# Altium PCB ESC.PcbDoc
Units mil, origin at the board's own origin, x right, y up, seen from the top; angles counter-clockwise.
Board outline 7000 x 4500 mil, 2 copper layers (Top Layer, Bottom Layer), stack 33.512 mil thick; 5 components, 103 nets, 48 pads, 0 vias.
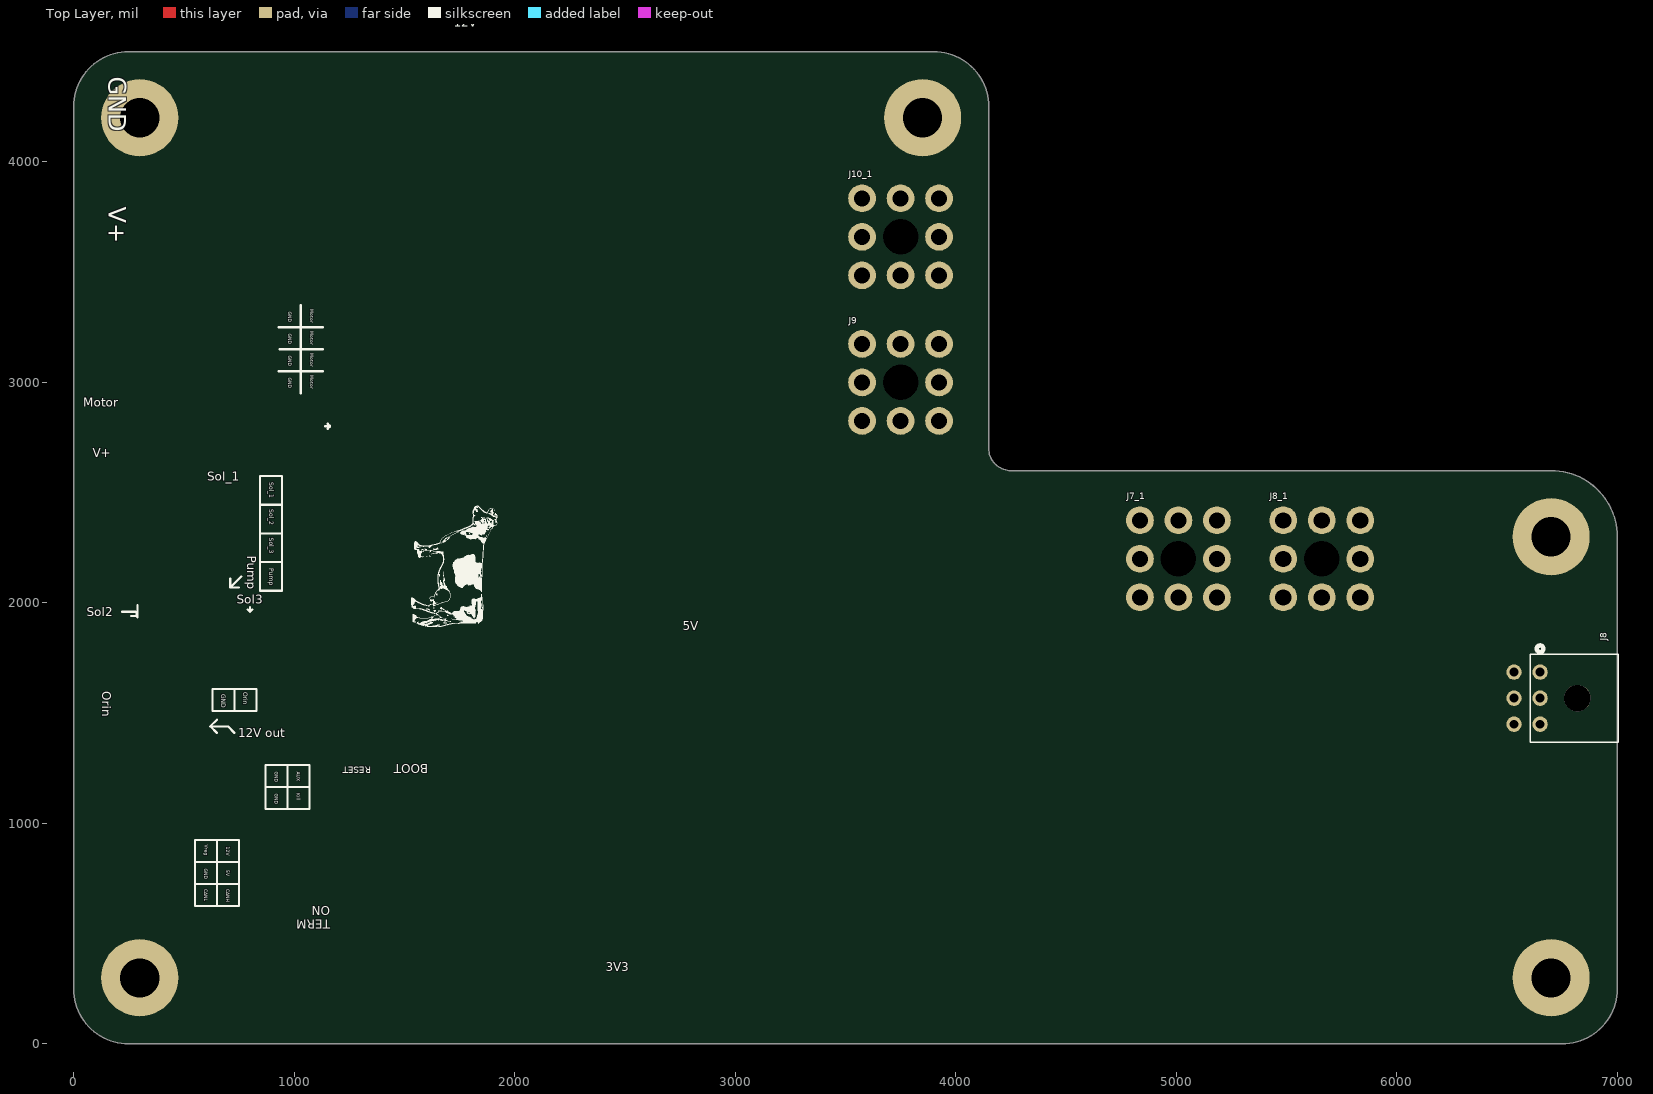
[diagram p0: Top Layer view]
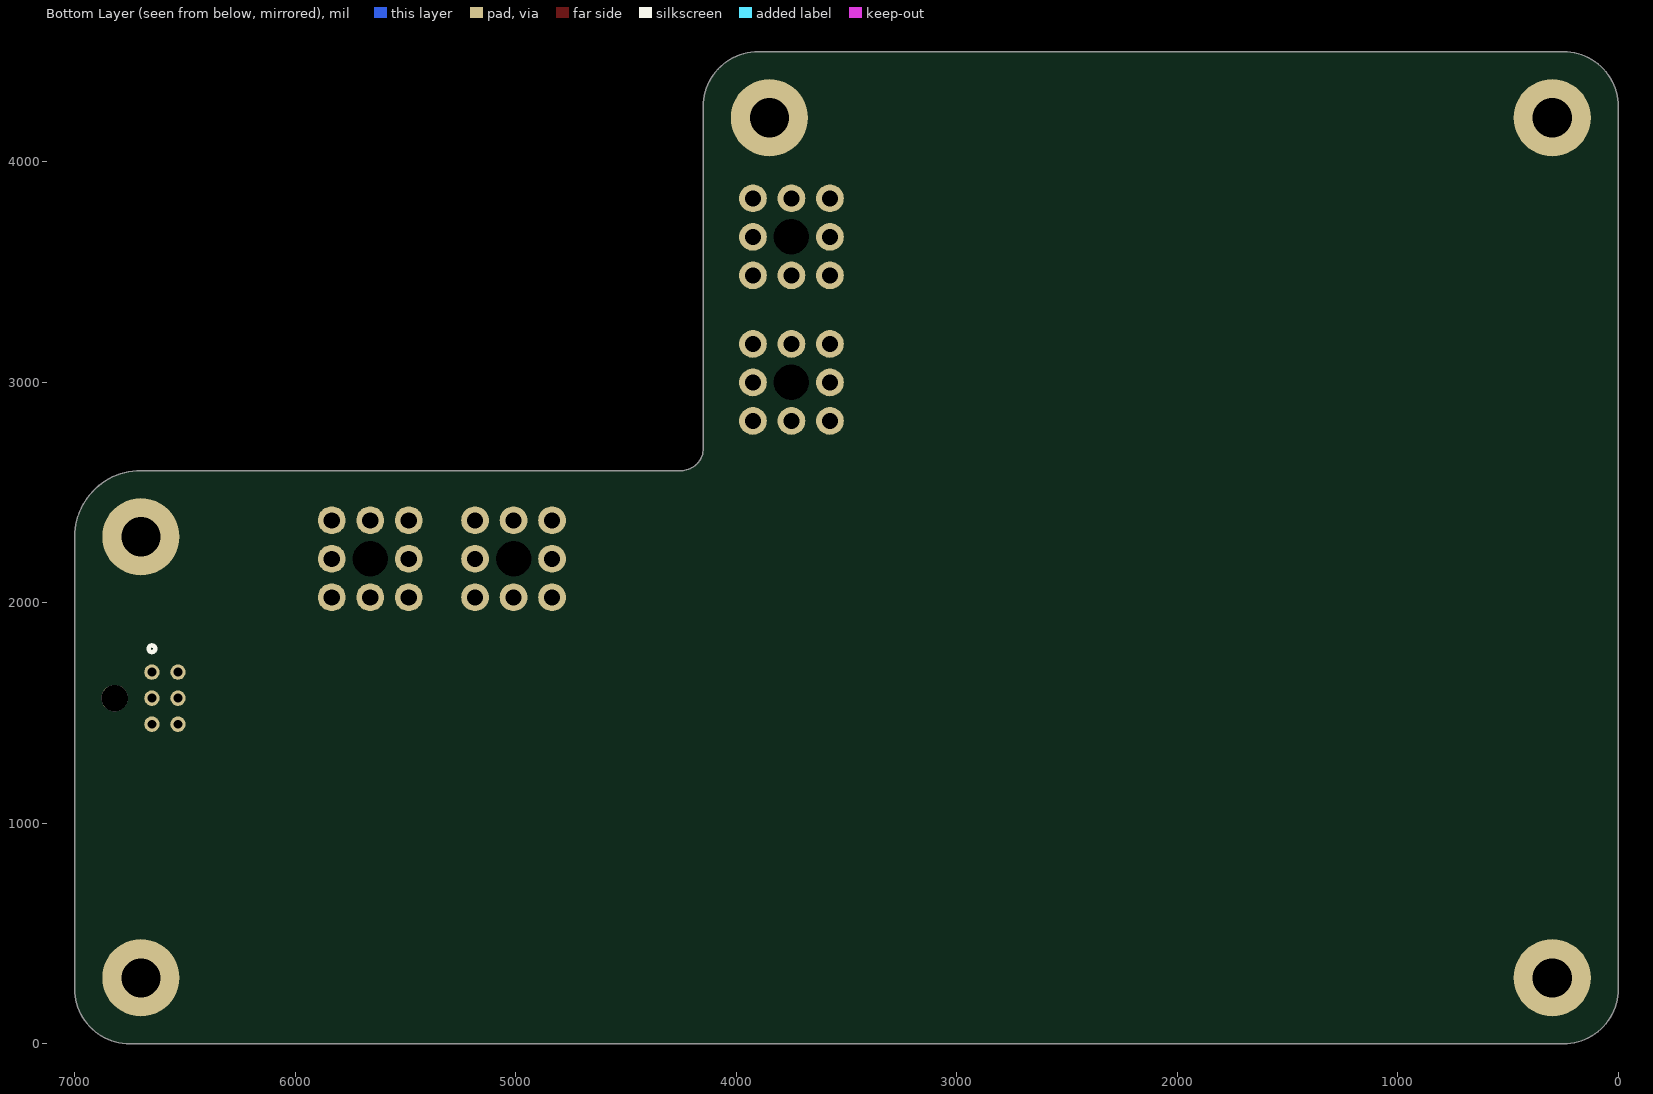
[diagram p1: Bottom Layer view, seen from below]

## Layer stack, top to bottom
Top Solder: solder mask 1, SM-001, Dk 4
Top Layer: signal copper 2.7559
Dielectric 3: core 28, Core-039, Dk 4.8
Bottom Layer: signal copper 2.7559
Bottom Solder: solder mask 1, SM-001, Dk 4

## Board outline
0,250 ccw(c250,250) 250,0 6750,0 ccw(c6750,250) 7000,250 7000,2300 ccw(c6700,2300) 6700,2600 4250,2600 cw(c4250,2700) 4150,2700 4150,4250 ccw(c3900,4250) 3900,4500 250,4500 ccw(c250,4250) 0,4250

## Design rules (kind name [scope] priority, off if disabled: settings)
AcuteAngle [All] p1: minimum=6.00000000000000E+0001 checktracksonly=FALSE
BoardOutlineClearance "BoardOutlineClearance JLCPCB" [All] p1: gap=7.87 ignorepadtopadclearanceinfootprint=FALSE
Clearance "Clearance JLCPCB 4 layer" [All] p1: gap=7.87 ignorepadtopadclearanceinfootprint=FALSE except(5: SMDPad-SMDPad; 6.3: Arc-Arc Arc-Track Arc-SMDPad Track-Track Track-SMDPad; 10: Arc-Hole Track-Hole SMDPad-Hole THPad-Hole Via-Hole Fill-Hole Poly-Hole Region-Hole Text-Hole)
DiffPairsRouting [All] p1: maxlimit=10 minlimit=6 mostfreqgap=8 toplayer_minwidth=3.54 toplayer_maxwidth=15 toplayer_prefwidth=8 bottomlayer_minwidth=3.54 bottomlayer_maxwidth=15 bottomlayer_prefwidth=8 maxuncoupledlength=500
HoleSize "HoleSize JLCPCB Pad" [IsPad] p1: absolutevalues=TRUE maxlimit=248.03 minlimit=19.68 maxpercent=80.000 minpercent=20.000
HoleSize "HoleSize JLCPCB 4 layer" [All] p2: absolutevalues=TRUE maxlimit=248.03 minlimit=7.87 maxpercent=80.000 minpercent=20.000
HoleToHoleClearance "HoleToHoleClearance JLCPCB" [All] p1: gap=10 allowstackedmicrovias=TRUE
MinimumAnnularRing "MinimumAnnularRing JLCPCB Pad" [IsPad] p1: minimumring=11.81
MinimumAnnularRing "MinimumAnnularRing JLCPCB 1oz" [All] p2: minimumring=5.12
MinimumSolderMaskSliver [All] p1: minsoldermaskwidth=1
PlaneConnect [All] p1: pad.planeconnectstyle=Relief pad.reliefexpansion=20 pad.reliefentries=4 pad.reliefconductorwidth=10 pad.reliefairgap=10 via.planeconnectstyle=Direct via.reliefexpansion=20 via.reliefentries=4 via.reliefconductorwidth=10 via.reliefairgap=10
PolygonConnect [All] p1: connectstyle=Direct reliefconductorwidth=15 reliefentries=4 polygonreliefangle="45 Angle" airgapwidth=10
RoutingVias "RoutingVias JLCPCB 4 layer" [All] p1: holewidth=19.68 width=39.37 viastyle="Through Hole" minholewidth=7.87 minwidth=15.75 maxholewidth=50 maxwidth=80
SilkToSilkClearance [All] p1: silktosilkclearance=3
SilkToSolderMaskClearance "SilkToSolderMaskClearance JLCPCB" [IsPad] p1: minsilkscreentomaskgap=5.91 clearancetoexposedcopper=TRUE
SolderMaskExpansion "SolderMaskExpansion JLCPCB" [All] p1: expansion=1.97 istentingtop=FALSE
SupplyNets "Schematic Supply Nets_2" [InNet('MOTOR_PWR')] p1: voltage=0.000
SupplyNets "Schematic Supply Nets_7" [InNet('5v')] p2: voltage=0.000
SupplyNets "Schematic Supply Nets_6" [InNet('V+')] p3: voltage=0.000
SupplyNets "Schematic Supply Nets_5" [InNet('Vreg')] p4: voltage=0.000
SupplyNets "Schematic Supply Nets_4" [InNet('12V')] p5: voltage=0.000
SupplyNets "Schematic Supply Nets_1" [InNet('3V3_RP2CAN')] p6: voltage=0.000
SupplyNets "Schematic Supply Nets" [InNet('GND')] p7: voltage=0.000
Width "Width JLCPCB 4 layer" [All] p1: maxlimit=196.85 minlimit=3.54 preferedwidth=9.84 minimp=50.000000 maximp=50.000000 favimp=50.000000
23 further rules are at their usual default settings.

## Classes and differential pairs
component class Connector: J8
differential pair class "USB 2.0": USB USB_RP2040
differential pair USB: +USB_P -USB_N
differential pair USB_RP2040: +USB_RP2040_P -USB_RP2040_N

## Components (designator, comment, footprint, x,y, rotation, side; value= is the part's Value field where it differs from the comment)
J7_1 "Redcube M4 Term 85A" "Redcube M4 Term 85A" 5010,2200 r0 top (schematic designator J7)
J8 "Microfit+ R/A" CONN_MOLEX_MICROFIT_6_POS_R/A 6650,1568.11 r90 top
J8_1 "Redcube M4 Term 85A" "Redcube M4 Term 85A" 5660,2200 r0 top (schematic designator J8)
J9 "Redcube M4 Term 85A" "Redcube M4 Term 85A" 3750,3000 r90 top
J10_1 "Redcube M4 Term 85A" "Redcube M4 Term 85A" 3750,3660 r90 top (schematic designator J10)

## Footprints (in the part's own frame and the unit in brackets; to place one, negate y for a bottom-side part, rotate by r counter-clockwise, add the part's x,y. Pads: shape width x height; smd on the part's side, far side on the other; paste and mask are expansions set on the pad)
CONN_MOLEX_MICROFIT_6_POS_R/A [mil] "CONN HEADER R/A 6POS 3MM"
  round 70 hole 40 paste-99999 mask+0: 1(118.11,0) 2(0,0) 3(-118.11,0) 4(118.11,118.11) 5(0,118.11) 6(-118.11,118.11)
  round 120 / inner round 60 / far side round 120 hole 120 unplated paste-99999 mask-60: 7(0,-169.29)
  silkscreen extent -199,-355 239,45, body extent -194,-353 194,129, height 325
"Redcube M4 Term 85A" [mm]
  round 3.2 hole 1.85: 1(-4.435,-4.435) 1(-4.435,0) 1(-4.435,4.435) 1(0,-4.435) 1(0,4.435) 1(4.435,-4.435) 1(4.435,0) 1(4.435,4.435)
  round 3.2 hole 4.1 unplated: 8(0,0)
  body extent -5,-5 5,5, height 3

## Part data
J7_1 J8_1 J9 J10_1: Current Rating="85 A", Created By="Nahtan Ayer", Screw Size=M4
J8: library part CONN_MOLEX_MICROFIT+_6POS_R/A, "Molex Microfit+  / 212528 6 POS R/A Black", Color=Black, Current Per Pin=12.5, Manufacturer=Molex, Supplier Part Number 1=900-2125280600-ND, Configuration=R/A, Pitch=3.0mm, Supplier 1=Digikey

## Free pads (board coordinates)
  round 350 hole 177 mask-99999: 2(300,300) 2(300,4200) 2(3850,4200) 2(6700,300) 2(6700,2300)

## Nets (pads, with @x,y where several pads share a name; then routed paths per layer and width w, separated by ;. In a path a pad name is that pad's centre, name@x,y a point inside that pad or via, vN(x,y) a via of type N, cw(c..) or ccw(c..) an arc to the next point about the centre after c; other vN are vias at no path point)
1v1_RP2040: 
3V3_MEAS: 
3V3_RP2CAN: 
5V: J8.5
5V_MEAS: 
12V: J8.6
12V_MEAS: 
ADC0: 
ADC1: 
AUX_SWITCH: 
CANCLK_RP2CAN: 
CANH: J8.4
CANL: J8.1
CANRX_RP2CAN: 
CANTX_RP2CAN: 
DBG_TX_RP2040: 
GND: J8.2
INT_RP2CAN: 
KILL_FEEDBACK: 
KILL_SWITCH: 
LEDB_RP2CAN: 
LEDG_RP2CAN: 
LEDR_RP2CAN: 
MISO_RP2CAN: 
MOSI_RP2CAN: 
MOTOR_EN: 
mOTOR_PWR: 
nCS_RP2CAN: 
NetC1_1: 
NetC2C_2: 
NetC2R_1: 
NetD1_1: 
NetD1C_1: 
NetD1C_2: 
NetD1C_3: 
NetD2_1: 
NetD3_1: 
NetD4_1: 
NetD5_1: 
NetD6_1: 
NetD7_1: 
NetD8_1: 
NetD9_1: 
NetD10_1: 
NetD11_1: 
NetPS1_6: 
NetPS2_6: 
NetQ1_4: 
NetQ3_4: 
NetQ4_4: 
NetQ5_4: 
NetQ10_4: 
NetQ11_4: 
NetQ12_4: 
NetR2C_1: 
NetR3C_1: 
NetR6C_1: 
NetR6R_1: 
NetR7R_1: 
NetR21_1: 
NetU1R_2: 
NetU1R_3: 
NetU1R_9: 
NetU1R_11: 
Orin_PWR: 
Orin_SW: 
Pump_PWR: 
Pump_SW: 
QSPI_SCLK_RP2040: 
QSPI_SD0_RP2040: 
QSPI_SD1_RP2040: 
QSPI_SD2_RP2040: 
QSPI_SD3_RP2040: 
QSPI_SS_RP2040: 
RUN_RP2040: 
SCK_RP2CAN: 
SCL_0_1: 
SCL_1: 
SCL_1_0: 
SDA_0_1: 
SDA_1: 
SDA_1_0: 
Sens_0: 
Sens_1: 
SOFTWARE_KILL: 
Solinoid_1_PWR: 
Solinoid_1_SW: 
Solinoid_2_PWR: 
Solinoid_2_SW: 
Solinoid_3_PWR: 
Solinoid_3_SW: 
SWCLK_RP2040: 
SWDIO_RP2040: 
TERM_DET_RP2CAN: 
USB_N: 
USB_P: 
USB_RP2040_N: 
USB_RP2040_P: 
V+: 
Vreg: J8.3
Vreg_MEAS: 
XIN_RP2040: 
XOUT_RP2040: 
pads on no net: J7_1.1 J7_1.8 J8.7 J8_1.1 J8_1.8 J9.1 J9.8 J10_1.1 J10_1.8

## Silkscreen, mask and mechanical layers (free items; w line width, h text height)
Top Overlay:
  drawing of 101 lines, arcs and shapes, not listed
  text "Vreg" at 568.36,4683.34 h50
  text "12V" at 1724.02,4613.01 h40
  text "GND" at 160.01,4386.12 h80 r270
  text "V+" at 160.01,3796.65 h80 r270
  text "Motor" at 1072.5,3332.49 h15 r270
  text "GND" at 972.5,3319.99 h15 r270
  text "Motor" at 1072.5,3232.49 h15 r270
  text "GND" at 972.5,3219.99 h15 r270
  text "Motor" at 1072.5,3132.49 h15 r270
  text "GND" at 972.5,3119.99 h15 r270
  text "Motor" at 1072.5,3032.49 h15 r270
  text "GND" at 972.5,3019.99 h15 r270
  text "Motor" at 43.36,2890.01 h40
  text "V+" at 86.68,2660.01 h40
  text "Sol_1" at 606.69,2553.34 h40
  text "Sol_1" at 886.67,2546.65 h20 r270
  text "Sol_2" at 886.67,2424.99 h20 r270
  text "Sol_3" at 886.67,2294.99 h20 r270
  text "Pump" at 786.67,2213.31 h40 r270
  text "Pump" at 888.34,2156.65 h20 r270
  text "Sol3" at 740.02,1996.01 h40
  text "Sol2" at 60.02,1940.01 h40
  text "5V" at 2761.68,1877.01 h40
  text "Orin" at 130.01,1599.98 h40 r270
  text "Orin" at 770,1594.99 h20 r270
  text "GND" at 670,1586.66 h20 r270
  text "12V out" at 746.71,1390.01 h40
  text "BOOT" at 1607.72,1267.94 h40 r180
  text "RESET" at 1349.98,1257.94 h30 r180
  text "GND" at 912.5,1234.99 h15 r270
  text "AUX" at 1012.5,1234.99 h15 r270
  text "Kill" at 1012.5,1137.49 h15 r270
  text "GND" at 912.5,1134.99 h15 r270
  text "Vreg" at 595,902.49 h15 r270
  text "12V" at 692.5,893.74 h15 r270
  text "GND" at 592.5,794.99 h15 r270
  text "5V" at 692.5,787.5 h15 r270
  text "CANL" at 592.5,702.49 h15 r270
  text "CANH" at 692.5,702.49 h15 r270
  text "TERM / ON" at 1163.9,623.43 h40 r180
  text "3V3" at 2412.68,330.01 h40
Top Solder:
  circle w175: c3850,4200 r87.5
  circle w175: c6700,300 r87.5
  circle w175: c6700,2300 r87.5
  circle w175: c300,300 r87.5
  circle w175: c300,4200 r87.5
Bottom Solder:
  circle w175: c3850,4200 r87.5
  circle w175: c6700,300 r87.5
  circle w175: c6700,2300 r87.5
  circle w175: c300,300 r87.5
  circle w175: c300,4200 r87.5